# Altium PCB MCU089B.PcbDoc (part 3 of 5)
Units mil, origin at the board's own origin, x right, y up, seen from the top; angles counter-clockwise.
Board outline 2300 x 5500 mil, 4 copper layers (Top Signal, GND, PWR, Bottom Signal), stack 61.6 mil thick; 261 components, 208 nets, 964 pads, 377 vias.
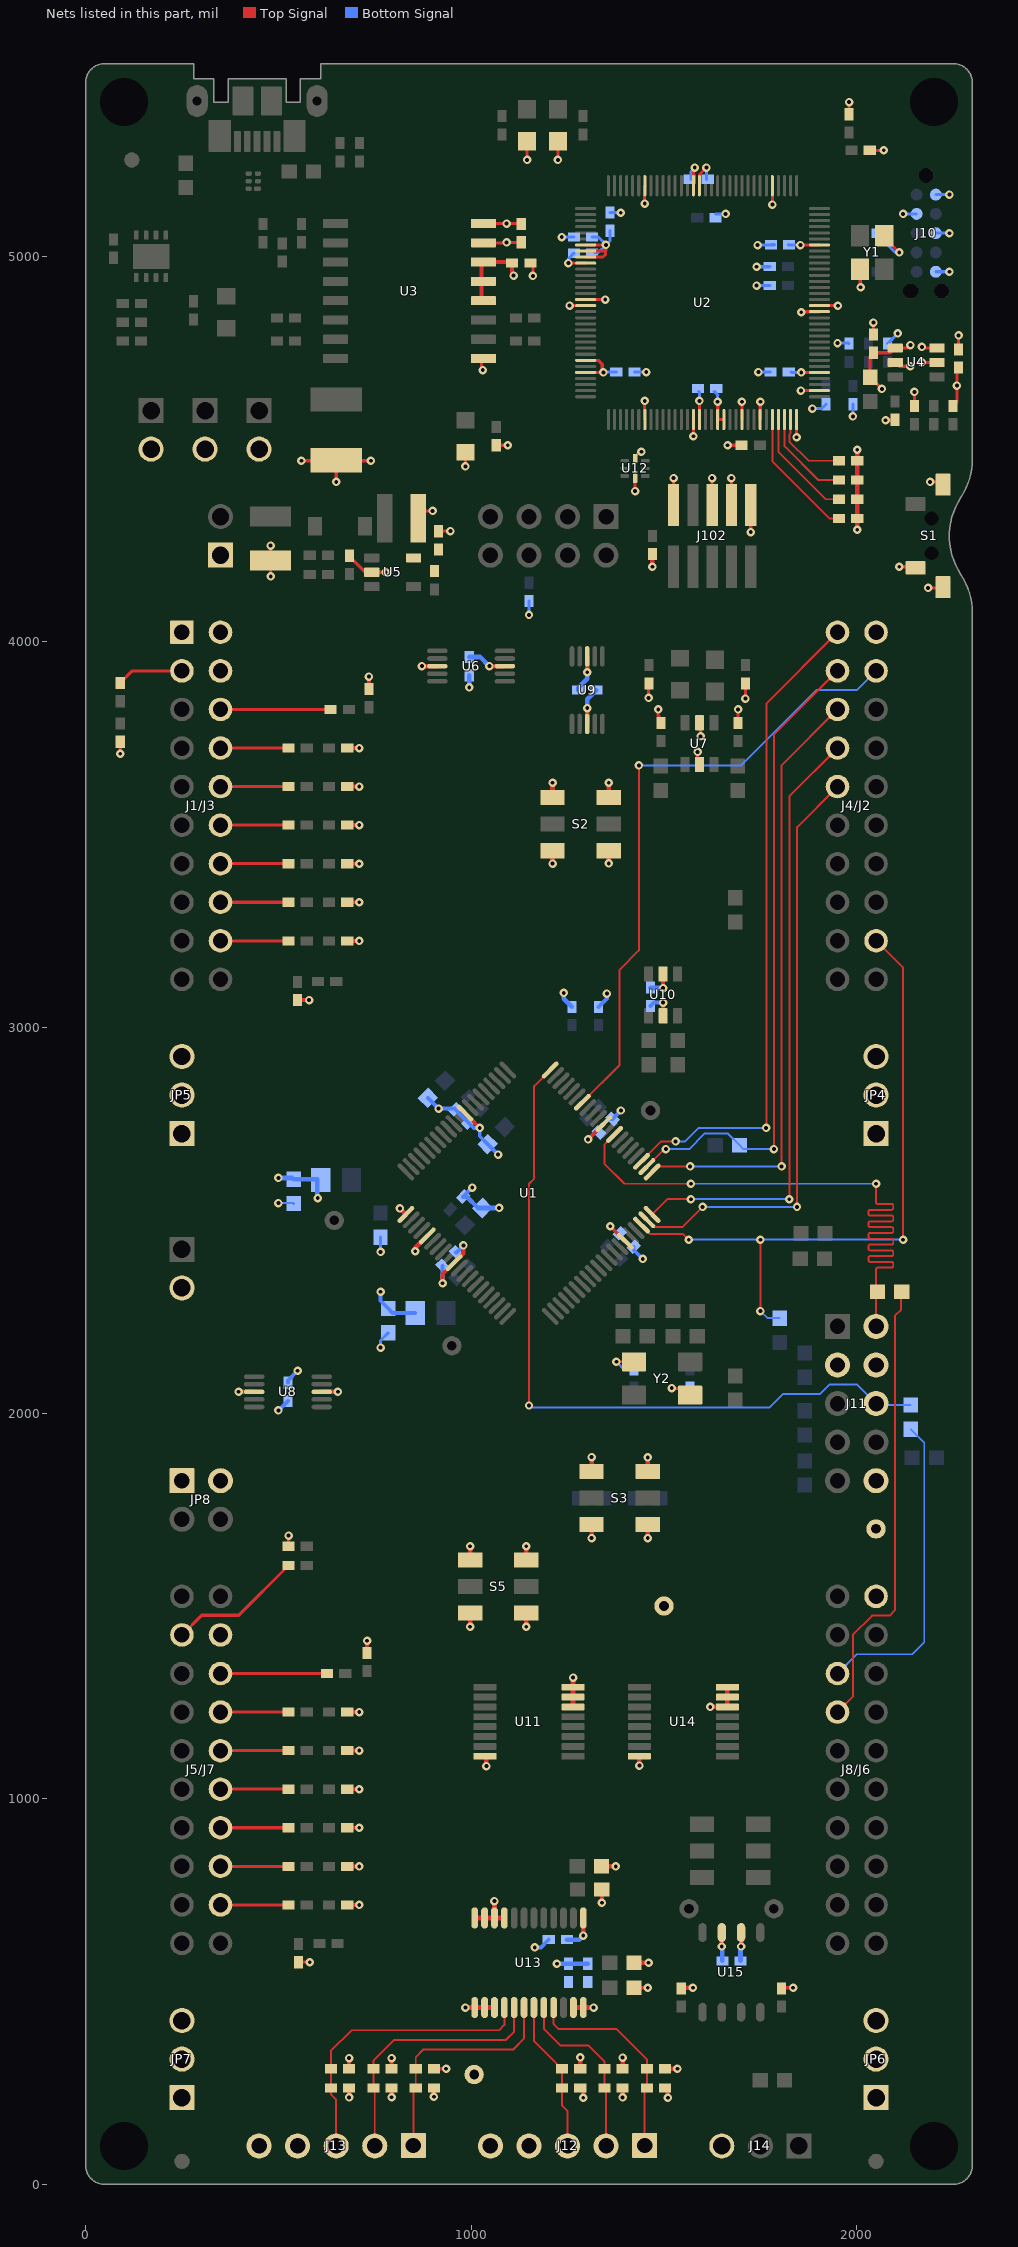
[diagram p4: the nets of this part, all layers, seen from the top]

## Part data (continued)
U1: library part CMP-0089804-2, "32-bit MCU with 100 MHz, FPU, TMU, 128-KB flash, CLB 80-LQFP -40 to 125", Frequency_Fixed=100MHz, Manufacturer="Texas Instruments", Max Supply Voltage=3.63V, Min Supply Voltage=2.8V, Operating Temperature Range="-40癈 to +125癈", AEC Category=Q200, AEC Qualified=No, ComponentLink1Description="Datasheet Link", ComponentLink1URL=http://www.ti.com/lit/ds/symlink/GPN.pdf, ComponentLink2Description="Product Folder", ComponentLink2URL=http://www.ti.com/product/GPN, ComponentLink3Description="Online Datasheet", ComponentLink3URL=http://www.ti.com/product/GPN/datasheet, CompType=IC, Core Architecture=TMS320C28x, Data Bus Width=32bits, Datasheet Path=datasheets/IC-TMS320F280025CPNSR.pdf, helpURL=https://upverter.com/upn/revision/e6f10be0003e77e0/, Interface=I2C,SPI,UART,CAN,LIN,SCI,Other, Memory Size=128KBytes, Memory Type=FLASH, Number Of A/D Converters=2, Number Of Adc Channels=16, Number Of Cores=1, Number Of I2C Channels=2, Number Of I/Os=43, Number Of Pwm Channels=14, Number Of Spi Channels=2, Number Of Timers/Counters=3, Number Of Uart Channels=1, PackageReference=LQFP80, PartId=1, Part Number=TMS320F280025CPNSR, PartNumber=TMS320F280025CPNSR, Ram Size=24KBytes, RoHS=UNKNOWN, SizeZ_mm=1.6mm, Standoff Height=0.05mm, TaMax_C=+125癈, TaMin_C=-40癈, TJmax_C=+125癈
U2: library part CMP-0077953-1, "MSP432E401YTPDT, PDT0128A (TQFP-128)", Alternate Manufacturer="Texas Instruments", Alternate PartNumber=MSP432E401YTPDTR, AEC Category=Q200, AEC Qualified=N, ComponentLink1Description="Datasheet Link", ComponentLink1URL=http://www.ti.com/lit/ds/symlink/tm4c129encpdt.pdf, ComponentLink2Description="Product Folder", ComponentLink2URL=TBD, CompType=IC, Manufacturer="Texas Instruments", MountType=SMT, PackageDescription=TQFP-128, PackageReference=PDT0128A, PartId=1, PartNumber=MSP432E401YTPDT, SizeArea_mm2=256, SizeAreaWB_mm2=324, SizeX_mm=16, SizeY_mm=16, SizeZ_mm=1.2
U3: library part CMP-0091303-1, "Full/Low Speed Isolated USB Repeater, SOIC16-Wide", Manufacturer="Texas Instruments", Max Supply Voltage=5.5V, Min Supply Voltage=3V, Nominal Supply Current=9-9.5mA, Operating Temperature Range="-55癈 to +150癈", AEC Qualified=No, Data Rate=12Mbits/s, Datasheet Path=datasheets/IC-ISOUSB111DW.pdf, helpURL=https://upverter.com/upn/revision/bd93d5af0e7edffb/, Interface=USB, Number of Ports=1, PackageReference=SOICW16, Part Number=ISOUSB111DW, PartNumber=ISOUSB111DW, RoHS=UNKNOWN, SizeZ_mm=2.65mm, Standoff Height=0.1mm, TaMax_C=+125癈, TaMin_C=-40癈, TJmax_C=+150癈, Usb Standard="USB 2.0"
U4: library part CMP-0067340-2, "High-Accuracy, Fixed-Threshold OV/UV Monitor, DDC0006A (SOT-23-T-6)", Alternate Manufacturer="Texas Instruments", Alternate PartNumber=TPS3702CX33DDCT, ComponentLink1Description="Datasheet Link", ComponentLink1URL=http://www.ti.com/lit/ds/symlink/tps3702.pdf, CompType=IC, LatestRevisionDate=2017-06-09, Manufacturer="Texas Instruments", MountType=SMT, PackageDescription=SOT-23-T-6, PackageReference=DDC0006A, PartNumber=TPS3702CX33DDCR, Publisher="Texas Instruments", RoHS=Y, SizeArea_mm2=4.8675, SizeAreaWB_mm2=10.4675, SizeX_mm=1.65, SizeY_mm=2.95, SizeZ_mm=0.87, U/M=EA
U5: library part CMP-0066119-1, "SIMPLE SWITCHER 2.7V to 5.5V, 2.1A Step-Up Regulator in SOT-23, DBV0005A (SOT-23-5)", Alternate Manufacturer="Texas Instruments", Alternate PartNumber=LMR62421XMFE/NOPB, ComponentLink1Description="Datasheet Link", ComponentLink1URL=http://www.ti.com/lit/ds/symlink/lmr62421.pdf, CompType=IC, Footprint Path 6=C:\AltiumLibraries\Footprints\TI\.PcbLib, Green_EU RoHS=Passed, Green_EU RoHS-2=Passed, Green_Lifecycle=Active, Green_REACh=Passed, LatestRevisionDate=2017-06-09, Manufacturer="Texas Instruments", MountType=SMT, PackageDescription=SOT-23-5, PackageReference=DBV0005A, PartNumber=LMR62421XMFX/NOPB, Publisher="Texas Instruments", RoHS=Y, SizeArea_mm2=8.12, SizeAreaWB_mm2=14.82, SizeX_mm=2.8, SizeY_mm=2.9, SizeZ_mm=1.45, U/M=EA
U6 U8 U9: library part CMP-0067418-1, "DUAL 10-Ohm SPDT ANALOG SWITCH, DGS0010A (VSSOP-10)", Alternate Manufacturer="Texas Instruments", Alternate PartNumber=TS5A23157DGST, ComponentLink1Description="Datasheet Link", ComponentLink1URL=http://www.ti.com/lit/ds/symlink/ts5a23157.pdf, CompType=IC, Footprint Path 6=C:\AltiumLibraries\Footprints\TI\.PcbLib, Green_EU RoHS=Passed, Green_EU RoHS-2=Passed, Green_Lifecycle=Active, Green_REACh=Passed, LatestRevisionDate=2017-06-09, Manufacturer="Texas Instruments", MountType=SMT, PackageDescription=VSSOP-10, PackageReference=DGS0010A, PartNumber=TS5A23157DGSR, Publisher="Texas Instruments", RoHS=Y, SizeArea_mm2=14.7, SizeAreaWB_mm2=23.6, SizeX_mm=4.9, SizeY_mm=3.0, SizeZ_mm=1.1, U/M=EA
U7: library part CMP-0051789-2, "Dual Buffer/Driver with Open-Drain Output, DBV0006A, LARGE T&R", F @ Nom Voltage(Max)(Mhz)=150, Generic Part Number=SN74LVC2G07, ICC @ Nom Voltage(Max)(mA)=0.01, Manufacturer="Texas Instruments", Operating Temperature Range(C)="-40 to 125", Rating=Catalog, tpd @ Nom Voltage(Max)(ns)=8.6,4.4,3.7,2.9, Voltage(Nom)(V)=1.8,2.5,3.3,5, 3-State Output=No, AEC Category=Q200, AEC Qualified=N, Bits(#)=2, ComponentLink1Description="Datasheet Link", ComponentLink1URL=http://www.ti.com/lit/ds/symlink/sn74lvc2g07.pdf, ComponentLink2Description="Product Folder", ComponentLink2URL=http://www.ti.com/product/sn74lvc2g07, ComponentLink3Description="Online Datasheet", ComponentLink3URL=http://www.ti.com/product/sn74lvc2g07/datasheet, CompType=IC, DatasheetVersion=SCES308K, Green_EU RoHS=Passed, Green_EU RoHS-2=Passed, Green_Lifecycle=Active, Green_REACh=Passed, Input Type=CMOS/TTL, Logic=True, MountType=SMT, Output Drive (IOL/IOH)(Max)(mA)=32/-32, Output Type=CMOS, PackageDescription=SOT-23-6, PackageReference=DBV0006A, PartNumber=SN74LVC2G07DBVR, RoHS=Y, Schmitt Trigger=No, SizeArea_mm2=8.12, SizeAreaWB_mm2=14.82, SizeX_mm=2.8, SizeY_mm=2.9, SizeZ_mm=1.45, Sub-Family="Inverting Buffer/Driver", Technology Family=LVC, VCC(Max)(V)=5.5, VCC(Min)(V)=1.65
U10: library part CMP-0051910-1, "Dual Buffer Gate, DBV0006A, LARGE T&R", F @ Nom Voltage(Max)(Mhz)=150, Generic Part Number=SN74LVC2G34, ICC @ Nom Voltage(Max)(mA)=0.01, Manufacturer="Texas Instruments", Operating Temperature Range(C)="-40 to 125,-40 to 85", Rating=Catalog, tpd @ Nom Voltage(Max)(ns)=8.6,4.4,4.1,3.2, Voltage(Nom)(V)=1.8,2.5,3.3,5, 3-State Output=No, Bits(#)=2, DatasheetVersion=SCES359I, Input Type=CMOS/TTL, Logic=True, Output Drive (IOL/IOH)(Max)(mA)=32/-32, Output Type=CMOS, PackageReference=DBV0006A, PartNumber=SN74LVC2G34DBVR, Schmitt Trigger=No, Sub-Family="Non-Inverting Buffer/Driver", Technology Family=LVC, VCC(Max)(V)=5.5, VCC(Min)(V)=1.65
U11 U14: library part CMP-0089841-1, "3 Circuit IC Switch 2:1 75Ohm 16-TSSOP", Digikey Part Number=296-3833-1-ND, Manufacturer="Texas Instruments", Max Supply Voltage=5.5V, Min Supply Voltage=2V, Mouser Part Number=595-SN74LV4053APWR, Nominal Supply Current=20uA, On State Resistance=100-225Ω, Operating Temperature Range="-40癈 to +85癈", -3Db Bandwith=50MHz, AEC Qualified=No, ComponentLink1Description=Datasheet, ComponentLink1URL=https://upverter.com/datasheet/3a9d815208c4051a64f1f6fd539a8c5a24990e71.pdf, Datasheet=https://upverter.com/datasheet/3a9d815208c4051a64f1f6fd539a8c5a24990e71.pdf, Datasheet Path=datasheets/IC-SN74LV4053APWR.pdf, Digikey Description="IC MUX/DEMUX TRIPLE 2X1 16TSSOP", helpURL=https://upverter.com/upn/revision/43c5e7c12a31b2aa/, Lead Free=Yes, Mouser Description="Multiplexer Switch ICs Triple 2-Ch Analog", Mux Demux Ratio=2:1, PackageReference=TSSOP16, Part Number=SN74LV4053APWR, PartNumber=SN74LV4053APWR, PositionCount=3, RoHS=TRUE, SizeZ_mm=1.2mm, Standoff Height=0.05mm, TaMax_C=+85癈, TaMin_C=-40癈
U12: library part CMP-0043125-4, "Low-Capacitance 6-Channel +/-15 kV ESD Protection Array for High-Speed Data Interfaces, RSE0008A (UQFN-8)", Breakdown Voltage(Min)(V)=6, IO Capacitance(Typ)(pF)=1.6, IO Leakage Current(nA)=1, Manufacturer="Texas Instruments", 1394 / Firewire=TRUE, AEC Category=Q200, AEC Qualified=N, ComponentLink1Description="Datasheet Link", ComponentLink1URL=http://www.ti.com/lit/ds/symlink/tpd6e004.pdf, ComponentLink2Description="Product Folder", ComponentLink2URL=http://www.ti.com/product/tpd6e004, ComponentLink3Description="Online Datasheet", ComponentLink3URL=http://www.ti.com/product/tpd6e004/datasheet, CompType=IC, DatasheetVersion=SLLS799A, Eco-Plan="Green (RoHS & no Sb/Br)", IEC 61000-4-2 Air-Gap(+/- kV)=12, IEC 61000-4-2 Contact(+/- kV)=8, MountType=SMT, PackageDescription=UQFN-8, PackageReference=RSE0008A, PackageVersion="revD, Jan-2011", PartNumber=TPD6E004RSER, RoHS=Y, Serial ATA / eSATA=TRUE, SizeArea_mm2=2.25, SizeAreaWB_mm2=6.25, SizeX_mm=1.5, SizeY_mm=1.5, SizeZ_mm=0.6, SubFamily="ESD Solution", USB High Speed=TRUE
U13: library part CMP-0066458-2, "8-Bit Dual-Supply Bus Transceiver with Configurable Voltage-Level Shifting and Three-State Outputs, PW0024A (TSSOP-24)", Alternate Manufacturer="Texas Instruments", Operating Temperature Range="-40 to 85 C", Rating=Catalog, AEC Category=Q200, AEC Qualified=N, ComponentLink1Description="Datasheet Link", ComponentLink1URL=http://www.ti.com/lit/ds/symlink/sn74lvc8t245.pdf, ComponentLink2Description="Product Folder", ComponentLink2URL=http://www.ti.com/product/sn74lvc8t245, ComponentLink3Description="Online Datasheet", ComponentLink3URL=http://www.ti.com/product/sn74lvc8t245/datasheet, CompType=IC, Manufacturer="Texas Instruments", MountType=SMT, PackageDescription=TSSOP-24, PackageReference=PW0024A, PartNumber=SN74LVC8T245PW, RoHS=Y, SizeArea_mm2=49.92, SizeAreaWB_mm2=82.32, SizeX_mm=6.4, SizeY_mm=7.8, SizeZ_mm=1.2
U15: library part CMP-0033355-1, "3.3V CAN Transceiver with Sleep Mode, 6 mA, -40 to 125 degC, 8-pin SOIC (D), Green (RoHS & no Sb/Br)", Bus Fault Voltage(V)=+/-30, Drivers Per Package=1, Low Power Mode=Sleep, Manufacturer="Texas Instruments", Rating=Catalog, Supply Voltage(s)(V)=3.3, Code_JEDEC=MS-012AA, ComponentLink1Description=Datasheet, ComponentLink1URL=http://www.ti.com/general/docs/lit/getliterature.tsp?genericPartNumber=SN65HVD234&fileType=pdf, DatasheetVersion=SLLS557F, Eco-Plan="Green (RoHS & no Sb/Br)", ICC(Max)(mA)=6, Isolated=No, Mounting Technology="Surface Mount", PackageDescription="8-Pin Plastic Small Outline Integrated Circuit, 4.9 x 3.9 mm, Pitch 1.27 mm Pitch", PackageReference=D0008A, PackageVersion="revM, Jun-2011", PartNumber=SN65HVD234DR, Receivers Per Package=1, SubFamily=CAN, Transient Pulse Protection(V)="-100 to 100"
U100: library part CMP-0043115-3, "4-Channel ESD Protection Array for High-Speed Data Interfaces, DRY0006A (USON-6)", Breakdown Voltage(Min)(V)=6, IO Capacitance(Typ)(pF)=1.6, IO Leakage Current(nA)=1, Manufacturer="Texas Instruments", Operating Temperature Range="-40 to 85 C", Rating=Catalog, 1394 / Firewire=TRUE, AEC Category=Q200, AEC Qualified=N, ComponentLink1Description="Datasheet Link", ComponentLink1URL=http://www.ti.com/lit/ds/symlink/tpd4e004.pdf, ComponentLink2Description="Product Folder", ComponentLink2URL=http://www.ti.com/product/tpd4e004, ComponentLink3Description="Online Datasheet", ComponentLink3URL=http://www.ti.com/product/tpd4e004/datasheet, CompType=IC, Eco-Plan="Green (RoHS & no Sb/Br)", IEC 61000-4-2 Air-Gap(+/- kV)=12, IEC 61000-4-2 Contact(+/- kV)=8, MountType=SMT, PackageDescription=USON-6, PackageReference=DRY0006A, PartNumber=TPD4E004DRYR, RoHS=Y, Serial ATA / eSATA=TRUE, SizeArea_mm2=1.45, SizeAreaWB_mm2=4.9, SizeX_mm=1.0, SizeY_mm=1.45, SizeZ_mm=0.6, USB High Speed=TRUE
U101: library part CMP-0036402-3, "Single Output High PSRR LDO, 1 A, Adjustable 1.2 to 5.5 V Output, 2.7 to 5.5 V Input, 8-pin SON (DRB), -40 to 125 degC, Green (RoHS & no Sb/Br)", Manufacturer="Texas Instruments", Accuracy(%)=2, AEC Category=Q200, AEC Qualified=N, ComponentLink1Description="Manufacturer URL", ComponentLink1URL=http://www.ti.com/, ComponentLink2Description=Datasheet, ComponentLink2URL=http://www.ti.com/general/docs/lit/getliterature.tsp?genericPartNumber=TPS79601&fileType=pdf, ComponentLink3Description="Package Specification", ComponentLink3URL=http://www.ti.com/litv/pdf/mpds118h, CompType=IC, DatasheetVersion=SLVS351N, Eco-Plan="Green (RoHS & no Sb/Br)", Iout(Max)(A)=1, Iq(Typ)(mA)=0.26, MountType=SMT, PackageDescription=VSON-8, PackageReference=DRB0008B, PackageVersion=4203482-2/K, PartNumber=TPS79601DRBR, RoHS=Y, SizeArea_mm2=9.0, SizeAreaWB_mm2=16.0, SizeX_mm=3.0, SizeY_mm=3.0, SizeZ_mm=1.0, SubFamily="Single Channel LDO", Vdo(Typ)(mV)=250, Vin(Max)(V)=5.5, Vin(Min)(V)=2.7, Vout Adj(Max)(V)=5.5, Vout Adj(Min)(V)=1.2
USB101: library part CMP-0055311-1, "Receptacle, USB 2.0, Micro B, 5 Position, R/A, SMT", Color=Black, Current_A=1.8A, Manufacturer=Molex, Supplier Part Number 1=WM11263CT-ND, Voltage_V=30V, Cert_UL=Y, CNHeader=FALSE, ComponentLink1Description="Datasheet URL", ComponentLink1URL=http://www.molex.com/pdm_docs/sd/1051640001_sd.pdf, CompType=USB, ContactFinish=Gold, CT=TRUE, Gender=Female, LatestRevisionDate=26/05/2017, MountType=SMT, Orientation=R/A, PackageReference="Receptacle, USB 2.0, Micro B, 5 Pos, 0.65mm Pitch, R/A, SMT", PartNumber=1051640001, PinCount=5, Pitch_mm=0.65, Publisher="Texas Instruments", RoHS=Y, Supplier 1=Digi-Key, Supplier 2=Newark, Supplier 3=Mouser, Supplier Part Number 2=99Y3224, Supplier Part Number 3=538-105164-0001
Y1: library part CMP-0004635-3, "Crystal, 16 MHz, 8pF, SMD", Frequency_Fixed=16MHz, Frequency Stability=+/-30ppm, Manufacturer=NDK, Supplier Part Number 1=644-1157-1-ND, ComponentLink1Description="Datasheet Link", ComponentLink1URL=http://www.ndk.com/images/products/catalog/c_NX3225GA-STD-CRG-1_e.pdf, CompType=Crystal, MountType=SMT, PackageReference=3.2x0.75x2.5mm, PartNumber=NX3225GA-16.000M-STD-CRG-1, RoHS=Y, Supplier 1=Digi-Key, TaMax_C=70癈, TaMin_C=-10癈
Y2: library part CMP-0093370-1, "20 MHz ?0ppm Crystal 8pF 40 Ohms 4-SMD, No Lead", Digikey Part Number=XC1841CT-ND, Frequency Stability=10ppm, Frequency_Fixed=20MHz, Load Capacitance=8pF, Manufacturer="ECS International", Mouser Part Number=520-200-8-30B-CKM, Operating Temperature Range="-20癈 to +70癈", AEC Qualified=No, ComponentLink1Description=Datasheet, ComponentLink1URL=https://ecsxtal.com/store/pdf/ecx_53b.pdf, Datasheet=https://ecsxtal.com/store/pdf/ecx_53b.pdf, Datasheet Path=datasheets/Crys-ECS-200-8-30B-CKM.pdf, Digikey Description="CRYSTAL 20.0000MHZ 8PF SMD", Esr=40, Frequency Tolerance=10ppm, helpURL=https://upverter.com/upn/revision/b9ae4a09c701963d/, Lead Free=Yes, Mouser Description="Crystals 20.000MHZ 8pF 10ppm -20C +70C", PackageReference=SMD4, Part Number=ECS-200-8-30B-CKM, PartNumber=ECS-200-8-30B-CKM, RoHS=TRUE, Series=ECX-53B, SizeZ_mm=0.85mm, Supplier 1=Digikey, Supplier 2=Mouser, Supplier Part Number 1=XC1841CT-ND, Supplier Part Number 2=520-200-8-30B-CKM, Tolerance_%=10ppm
ZZ1: library part CMP-0077236-1, ClassName=AssemblyNote, CompType=AssemblyNote, Key=AssemblyNote, LatestRevisionDate=2017-08-10, Publisher="Texas Instruments"
ZZ2: library part CMP-0077237-1, ClassName=AssemblyNote, CompType=AssemblyNote, Key=AssemblyNote, LatestRevisionDate=2017-08-10, Publisher="Texas Instruments"
ZZ3: library part CMP-0077238-1, ClassName=AssemblyNote, CompType=AssemblyNote, Key=AssemblyNote, LatestRevisionDate=2017-08-10, Publisher="Texas Instruments"

## Free pads (board coordinates)
  rrect9% 41.73x57.87 on Top Paste: 9(145.2,5000) 9(194.8,5000)

## Via types
v1: diameter 22, hole 10, Top Signal to Bottom Signal, tented both sides, 377 vias

## Nets (pads, with @x,y where several pads share a name; then routed paths per layer and width w, separated by ;. In a path a pad name is that pad's centre, name@x,y a point inside that pad or via, vN(x,y) a via of type N, cw(c..) or ccw(c..) an arc to the next point about the centre after c; other vN are vias at no path point)
+3V3: C1.2 C2.2 C5.1 C6.2 C16.1 C18.1 C43.1 C44.2 C45.1 C46.2 C49.2 C51.1 C52.1 C53.1 C54.1 C55.1 C56.1 C57.1 C58.1 C64.1 C74.2 J1/J3.1 J10.1 J11.10 J102.1 JP2.2 JP4.1 JP6.1 JP8.1 L1.1 L2.2 L3.1 R3.2 R4.2 R6.2 R8.2 R10.2 R11.2 R28.2 R29.2 R30.2 R31.2 R47.2 R48.2 R57.2 R58.2 R59.2 R60.2 R61.2 R65.2 R70.2 R78.2 S2.1 S2.4 S3.3 S3.6 S5.3 S5.6 TP4.1 U2.7 U2.8 U2.9 U2.16 U2.26 U2.28 U2.39 U2.47 U2.51 U2.52 U2.69 U2.79 U2.90 U2.101 U2.113 U2.122 U3.12 U3.13 U3.14 U3.16 U4.3 U4.4 U4.5 U5.5 U6.8 U7.5 U8.8 U9.8 U10.5 U11.16 U12.8 U13.1 U14.16 U15.3 | length 3763
  Top Signal w8: L1.1@860.44,4318.04 L1.1@862.78,4320.38 882.4,4340 v1(900,4340) ; U3.16@1027.01,5085 C1.2@1135,5085 ; R3.2@1065,4510.04 v1(1095,4510.11) ; U2.28@1296.85,4698.9 1296.95,4699 v1(1343,4699) ; U2.26@1296.85,4730.39 1329.61,4730.39 1340,4720 v1@1340,4700 ; U2.16@1296.85,4887.87 v1(1347.87,4887.87) ; U2.9@1296.85,4998.11 1341.75,4998.11 1347.86,5004.22 1347.86,5013.86 ; U2.8@1296.85,5013.86 1347.86,5013.86 ; U2.7@1296.85,5029.61 1349,5029.61 1349,5015 1347.86,5013.86 ; v1(1425,4391.38) U12.8@1425,4424.41 ; v1(1450,4625) 1450,4577.24 U2.39@1450.39,4576.85 ; v1(1450,5137) 1450,5182.76 U2.122@1450.39,5183.15 ; v1(1460,3855) R28.2@1460,3883.57 ; R28.2@1462.04,3891.53 R28.2@1460,3889.49 ; v1(1485,3825) 1485,3808.57 1492.04,3801.53 R30.2@1492.04,3790.15 R30.2@1491.35,3790.84 ; v1(1576.38,4533.62) U2.47@1576.38,4576.85 ; U7.5@1592.04,3790.66 1595,3787.7 v1(1595,3755) ; U2.113@1592.13,5183.15 1592.13,5212.13 v1(1610,5230) ; v1(1639,4623) 1639,4619.74 1639.37,4619.37 1639.37,4576.85 U2.52@1654.78,4576.85 ; R31.2@1692.04,3790.15 v1(1692.04,3825) ; v1(1711.41,3853.35) 1711.41,3881.49 1717.04,3887.12 R29.2@1711.41,3892.75 ; v1(1725,4285) J102.1@1725,4355.12 ; v1(1781,5134) 1781,5183.05 U2.101@1781.1,5183.15 ; v1(1854,5029) 1901.76,5029 1902.76,5030 U2.90@1903.15,5029.61 ; v1@1855,4855 1856.38,4856.38 U2.79@1903.15,4856.38 ; v1(1856,4699) 1861,4699 1861.1,4698.9 U2.69@1903.15,4698.9 ; v1(2065,4656.22) R6.2@2034.61,4686.61 2034.61,4741.38 C44.2@2043.23,4750 2087.48,4750 U4.4@2099.88,4762.4 2131.42,4762.4 v1(2139.02,4770) ; U4.5@2099.88,4725 2109.88,4715 v1(2139.02,4715) ; R4.2@2149.61,4612 v1(2149.61,4648.38) ; v1(2169.02,4765) 2173.21,4765 2176.21,4762 2176.61,4762.4 U4.3@2208.15,4762.4 ; C6.2@2264.02,4758.62 v1(2264.02,4795) ; R28.2@1460,3883.57 1457.04,3886.53 R28.2@1460,3889.49 ; R28.2@1460,3883.57 R28.2@1460,3889.49
  Top Signal w10: U3.12@1027.01,4885 1027.01,4935 1027.01,4985 1103.74,4985 C2.2@1106.38,4982.36 1106.38,4953.62 v1(1110,4950) ; v1(1497.6,3102.6) U10.5@1497.6,3138.76
  Top Signal w12: U8.8@612.6,2055.5 v1(654.5,2055.5) ; S5.6@997.34,1619.4 v1(997.34,1655) ; U11.16@1035.83,1110.43 1039.43,1106.83 v1(1039.43,1085) ; v1(1047.34,3937.39) U6.8@1087.57,3937.39 ; S5.3@1143.01,1619.4 v1(1143.01,1655) ; S2.1@1210.98,3596.53 v1(1210.98,3635) ; v1(1290.75,645.46) U13.1@1290.75,691.14 ; v1(1300.9,3921.5) U9.8@1300.9,3962.6 ; S3.6@1312.28,1848.9 v1(1312.28,1886.4) ; R47.2@1338.35,825 v1(1375,825) ; S2.4@1356.65,3596.53 v1(1356.65,3635) ; R48.2@1422.24,575 v1(1460,575) ; v1(1436.21,1086.21) U14.16@1436.21,1110.43 ; S3.3@1457.95,1848.9 v1(1457.95,1885.49) ; v1(1470,4195) R57.2@1470,4227.69 ; R78.2@1544.88,508.62 1546.26,510 v1(1575,510) ; v1(1650,617.1) U15.3@1650,653.35 ; v1(2001.1,4291.1) R61.2@2001.1,4320 R60.2@2001.1,4370 R59.2@2001.1,4420 R58.2@2001.1,4470 v1(2001.1,4498.5)
  Bottom Signal w8: v1(1150,4070) R10.2@1150,4106.38 ; C58.1@1313.62,5050 1330,5050 1350,5030 1360,5040 C56.1@1360,5066.38 ; C57.1@1320,5010 1330,5010 v1(1349.61,5029.61) ; v1@1340,4700 C55.1@1376.38,4700 ; C51.1@1610,5200 v1(1610,5230) ; C54.1@1630,4650 1640,4640 1639,4639 v1(1639,4623) ; C52.1@1823,5030 1824,5029 v1(1854,5029) 1859,5029 1860,5030 v1@1854,5030 ; C53.1@1830,4700 1831,4699 v1(1856,4699) ; v1(1885,4605) 1908.62,4605 R70.2@1920,4616.38 ; v1(1950,4775) 1978.62,4775 R65.2@1980,4773.62 ; J10.1@2205,5160 v1(2240,5160)
  Bottom Signal w10: C45.1@525,2079.12 525,2085 v1(550,2110) ; v1(765,2314.88) 765,2291.5 C18.1@785,2271.5 796.5,2260 L3.1@855,2260
  Bottom Signal w12: v1(500,2610) 536.5,2610 C16.1@540,2606.5 600.55,2606.5 600.55,2559.45 v1(602.05,2557.95) ; C43.1@995,3961.01 1023.72,3961.01 v1(1047.34,3937.39) ; v1(1240,3090) 1240,3074.68 R11.2@1261.06,3053.62 ; C64.1@1248.62,635.05 1280.34,635.05 v1(1290.75,645.46) ; C46.2@1277.28,3875 1277.28,3881.53 1300.9,3905.15 v1(1300.9,3921.5) ; C49.2@1465,3103.62 1466.02,3102.6 v1(1497.6,3102.6) ; v1(1650,617.1) 1651.38,615.73 C74.2@1651.38,580
  other v1: 1856,4855 1092,5085
+5V0: C65.2 C67.1 J1/J3.21 J12.4 J13.4 JP3.2 JP5.1 JP7.1 JP8.2 JP9.1 R62.1 R72.2 R73.2 R74.2 R75.2 R76.2 R77.2 TP5.1 U13.23 U13.24 | length 234.3
  Top Signal w8: R62.1@1980,5368.62 v1(1980,5400)
  Top Signal w12: v1(683.62,225.99) R77.2@683.62,250 ; v1(793.62,226.1) R76.2@793.62,250 ; v1(903.62,227.36) R75.2@903.62,250 ; U13.23@1265.16,458.86 U13.24@1290.75,458.86 v1(1317.29,458.86) ; R74.2@1282.87,250 1290.75,242.13 v1(1290.75,225) ; v1(1392.87,225.99) R73.2@1392.87,250 ; R72.2@1502.87,250 1510,242.87 v1(1510,225)
ADCINA0/C15: J5/J7.69 R12.1 | length 176.4
  Top Signal w8: J5/J7.69@350,725 R12.1@526.38,725
ADCINA1: J5/J7.42 R13.1 | length 350.9
  Top Signal w8: J5/J7.42@250,1425 301.1,1476.1 397.48,1476.1 R13.1@526.38,1605
ADCINA2/C9: J1/J3.25 R14.1 | length 176.4
  Top Signal w8: J1/J3.25@350,3625 R14.1@526.38,3625
ADCINA3/C5: J1/J3.24 R15.1 | length 176.4
  Top Signal w8: J1/J3.24@350,3725 R15.1@526.38,3725
ADCINA4/C14: J5/J7.66 R16.1 | length 176.4
  Top Signal w8: J5/J7.66@350,1025 R16.1@526.38,1025
ADCINA5/C2: J5/J7.63 R17.1 | length 276.4
  Top Signal w8: J5/J7.63@350,1325 R17.1@626.38,1325
ADCINA6: J1/J3.23 R18.1 | length 285.7
  Top Signal w8: J1/J3.23@350,3825 R18.1@635.68,3825
ADCINA7/C3: J5/J7.64 R19.1 | length 176.4
  Top Signal w8: J5/J7.64@350,1225 R19.1@526.38,1225
ADCINA8/C11: J5/J7.65 R20.1 | length 176.4
  Top Signal w8: J5/J7.65@350,1125 R20.1@526.38,1125
ADCINA9/C8: J5/J7.67 R21.1 | length 176.4
  Top Signal w8: J5/J7.67@350,925 R21.1@526.38,925
ADCINA10/C10: J5/J7.68 R22.1 | length 176.4
  Top Signal w8: J5/J7.68@350,825 R22.1@526.38,825
ADCINA11/C0: J1/J3.28 R23.1 | length 176.4
  Top Signal w8: J1/J3.28@350,3325 R23.1@526.38,3325
ADCINA12/C1: J1/J3.29 R24.1 | length 176.4
  Top Signal w8: J1/J3.29@350,3225 R24.1@526.38,3225
ADCINA14/C4: J1/J3.27 R25.1 | length 176.4
  Top Signal w8: J1/J3.27@350,3425 R25.1@526.38,3425
ADCINA15/C7: J1/J3.26 R26.1 | length 176.4
  Top Signal w8: J1/J3.26@350,3525 R26.1@526.38,3525
ADCINC6: J1/J3.2 R27.1 | length 173
  Top Signal w8: R27.1@90,3893.62 121.38,3925 J1/J3.2@250,3925
DEBUG_ID4: R58.1 U2.63 | length 207.4
  Top Signal w5: U2.63@1828.35,4576.85 1828.35,4541.51 1825.5,4538.66 1825.5,4519.5 1875,4470 R58.1@1953.86,4470
DEBUG_ID5: R59.1 U2.62 | length 246.9
  Top Signal w5: U2.62@1812.6,4576.85 1812.6,4507.4 1900,4420 R59.1@1953.86,4420
DEBUG_ID6: R60.1 U2.61 | length 291.7
  Top Signal w5: U2.61@1796.85,4576.85 1796.85,4493.15 1920,4370 R60.1@1953.86,4370
DEBUG_ID7: R61.1 U2.60 | length 342.4
  Top Signal w5: U2.60@1781.1,4576.85 1781.1,4468.9 1930,4320 R61.1@1953.86,4320
EQEP1A: C68.1 J12.1 R72.1 U13.21 | length 548.4
  Top Signal w5: U13.21@1213.98,458.86 1213.98,415.59 1225.95,403.61 1376.39,403.61 1455.63,324.37 C68.1@1455.63,300 R72.1@1455.63,250 1450,244.37 J12.1@1450,101
EQEP1B: C69.1 J12.2 R73.1 U13.20 | length 468.6
  Top Signal w5: U13.20@1188.39,458.86 1188.39,403.61 1232,360 1305,360 1345.63,319.37 C69.1@1345.63,300 R73.1@1345.63,250 1350,245.63 J12.2@1350,100
EQEP1I: C70.1 J12.3 R74.1 U13.19 | length 395.3
  Top Signal w5: U13.19@1162.8,458.86 1162.8,372.2 1235,300 C70.1@1235.63,300 R74.1@1235.63,250 1235.63,204.37 1250,190 J12.3@1250,100
EQEP2A: C71.1 J13.1 R75.1 U13.18 | length 613
  Top Signal w5: J13.1@850,101 850,243.62 R75.1@856.38,250 C71.1@856.38,300 856.38,330.17 876.21,350 1108.62,350 1137.2,378.58 U13.18@1137.2,458.86
EQEP2B: C72.1 J13.2 R76.1 U13.17 | length 681.7
  Top Signal w5: J13.2@750,100 750,246.38 R76.1@746.38,250 C72.1@746.38,300 746.38,321.38 800,375 1090.37,375 1111.61,396.25 U13.17@1111.61,458.86
EQEP2I: C73.1 J13.3 R77.1 U13.16 | length 774.7
  Top Signal w5: J13.3@650,100 650,220 636.38,233.62 R77.1@636.38,250 C73.1@636.38,300 636.38,346.38 690,400 1072.27,400 1086.02,413.75 U13.16@1086.02,458.86
GND: C1.1 C2.1 C4.2 C5.2 C6.1 C7.2 C8.2 C9.1 C10.2 C11.2 C12.2 C13.2 C14.1 C15.2 C16.2 C17.1 C18.2 C19.2 C20.1 C21.1 C22.1 C23.1 C24.2 C25.2 C26.2 C27.2 C28.2 C29.2 C30.2 C31.2 C32.2 C33.2 C34.2 C35.2 C36.2 C37.2 C38.2 C39.2 C40.2 C41.2 C42.2 C43.2 C44.1 C45.2 C46.1 C47.2 C48.2 C49.1 C50.2 C51.2 C52.2 C53.2 C54.2 C55.2 C56.2 C57.2 C58.2 C59.2 C60.2 C61.2 C62.2 C63.2 C64.2 C65.1 C66.2 C67.2 C68.2 C69.2 C70.2 C71.2 C72.2 C73.2 C74.1 C104.1 J1/J3.22 J4/J2.20 J5/J7.62 J8/J6.60 J10.3 J10.5 J10.9 J11.3 J11.4 J12.5 J13.5 J14.3 J15.2 J102.3 J102.5 J102.9 JP1.2 JP4.2 JP4.3 JP5.2 JP5.3 JP6.2 JP6.3 JP7.2 JP7.3 LED1.1 LED2.2 LED3.2 R9.1 R52.1 R53.2 R67.1 R68.1 R80.1 S1.1 S1.2 S1.3 S2.3 S2.6 S3.1 S3.4 S5.1 S5.4 TP6.1 U1.9 U1.21 U1.25 U1.30 U1.55 U1.70 U2.10 U2.17 U2.48 U2.55 U2.58 U2.64 U2.66 U2.80 U2.114 U3.9 U3.15 U4.2 U5.2 U6.3 U7.2 U8.3 U9.3 U10.2 U11.6 U11.7 U11.8 U12.4 U13.9 U13.10 U13.11 U13.12 U13.13 U13.14 U13.15 U14.6 U14.7 U14.8 U15.2 Y1.2 Y1.4 Y2.2 Y2.4 | length 5981.5
  Top Signal w6: v1(1376.69,2133.31) Y2.4@1422.17,2133.31 ; v1(1520,2065) 1549.53,2065 Y2.2@1567.83,2046.69
  Top Signal w8: v1(480,4250) C4.2@480,4211.45 480.19,4211.26 v1(480.19,4170) ; C33.2@526.38,1655 v1(526.38,1682.79) ; C47.2@551.91,576.38 v1(581.36,576.38) ; R9.1@685,4223.62 685,4221.28 725.51,4180.77 U5.2@742.33,4180.77 v1(778.47,4180.77) ; C5.2@915,4287.24 938.62,4287.24 939,4287.62 v1(946,4287.62) ; v1(985,4455.11) LED1.1@985,4492.32 ; v1@1027.01,4712.99 U3.9@1027.01,4735 ; U3.15@1027.01,5035 1090,5035 1091.38,5036.38 C1.1@1128.38,5036.38 ; C1.1@1130,5036.38 C1.1@1128.38,5036.38 ; C1.1@1130,5038 C1.1@1128.38,5036.38 ; v1(1145,5250) LED2.2@1145,5298.66 ; C2.1@1153.62,4982.36 1160,4975.98 v1(1160,4949.37) ; v1(1225,5250) LED3.2@1225,5298.66 ; v1(1252.36,4982.36) U2.10@1296.85,4982.36 ; v1(1255.13,4872.13) U2.17@1296.85,4872.13 ; U12.4@1425,4475.59 1425,4480 1438.2,4493.2 v1(1441.59,4493.2) ; J102.9@1525,4355.12 v1(1525,4425) ; U2.114@1576.38,5183.15 1576.38,5226.38 v1(1580,5230) ; v1(1587.04,3715) 1587.04,3686.53 U7.2@1592.04,3681.53 ; v1(1592,4625) 1592,4618 1592.13,4617.87 U2.48@1592.13,4576.85 ; J102.5@1625,4355.12 v1(1625,4425) ; v1(1665,4510.11) R68.1@1701.38,4510.11 ; J102.3@1675,4355.12 v1(1675,4425) ; v1@1700,4625 v1(1702,4623) 1702.36,4622.64 U2.55@1702.36,4576.85 ; U2.58@1749.61,4576.85 1749.61,4624.61 v1@1750,4625 ; v1(1844,4531) 1844,4540.81 1844.09,4540.91 U2.64@1844.09,4576.85 ; v1@1851.65,4651.65 v1@1855,4651.65 ; v1@1855,4650 1856.65,4651.65 U2.66@1903.15,4651.65 ; v1(1855,4652) v1@1861.31,4652 ; U2.80@1903.15,4872.13 1947.87,4872.13 v1@1950,4870 ; v1@1950,4872 v1(1951,4872) ; Y1.4@2008.5,4966.69 2008.5,4931.5 2010,4930 v1(2010,4920) ; C50.2@2033.62,5275 v1(2070,5275) ; C44.1@2043.23,4797.24 v1(2043.23,4828.23) ; Y1.2@2070,5050 v1(2110,5010) ; v1(2074.61,4575) 2097.64,4575 C8.2@2099.02,4576.38 C8.2@2102.64,4580 ; v1(2110,4195) 2150,4195 S1.3@2150,4185 ; v1(2169.02,4725) U4.2@2208.15,4725 ; v1(2185,4140) S1.1@2225,4140 ; v1(2190,4415) 2216.18,4415 S1.2@2223.31,4407.87 ; C7.2@2249.61,4612 2259.61,4622 v1(2259.61,4665) 2259.61,4706.97 C6.1@2264.02,4711.38
  Top Signal w10: v1(90,3710) C40.2@90,3741.38 ; C48.2@549.19,3071.38 v1(579.62,3071.38) ; v1(560,4470) 649.27,4470 C104.1@650,4469.27 ; v1(650,4415) C104.1@650,4469.27 ; C25.2@678.62,725 v1(710,725) ; C30.2@678.62,825 v1(710,825) ; C37.2@678.62,925 v1(710,925) ; C27.2@678.62,1025 v1(710,1025) ; C29.2@678.62,1125 v1(710,1125) ; C36.2@678.62,1225 v1(710,1225) ; C31.2@678.62,3225 v1(710,3225) ; C38.2@678.62,3325 v1(710,3325) ; C39.2@678.62,3425 v1(710,3425) ; C32.2@678.62,3525 v1(710,3525) ; C26.2@678.62,3625 v1(710,3625) ; C34.2@678.62,3725 v1(710,3725) ; C73.2@683.62,300 v1(683.62,327.69) ; C35.2@730,1378.62 v1(730,1410) ; C28.2@735,3877.93 v1(735,3910) ; v1(740,4470) 650.73,4470 C104.1@650,4469.27 ; C72.2@793.62,300 v1(793.62,327.58) ; C71.2@903.62,300 v1(935,300) ; v1(925.96,2337) 925.96,2360.45 U1.30@955.81,2390.29 980,2414.49 v1(980,2435) ; U1.9@983.64,2778.64 v1(1022.29,2740) ; v1(1303.35,2710) U1.70@1344.16,2750.81 ; v1(1338.9,730.54) R52.1@1338.9,765 ; v1(1360.81,2485) U1.55@1399.84,2445.97 ; R53.2@1422.24,510 v1(1457.95,510) ; U10.2@1497.6,3030.49 v1(1497.6,3065) ; R80.1@1805,508.62 1806.38,510 v1(1835,510)
  Top Signal w12: v1(397,2055.5) U8.3@437.4,2055.5 ; v1(815.09,2531) U1.21@830.53,2515.57 ; v1(855,2420) 855,2428.68 U1.25@886.21,2459.89 ; v1(872.34,3937.39) U6.3@912.38,3937.39 ; v1(985,458.86) U13.13@1009.25,458.86 U13.14@1034.84,458.86 U13.15@1060.43,458.86 ; v1(997.34,1446.35) S5.4@997.34,1481.6 ; U13.12@1009.25,691.14 U13.11@1034.84,691.14 U13.10@1060.43,691.14 U13.9@1086.02,691.14 ; U13.10@1060.43,691.28 v1(1060.43,735) ; v1(1143.01,1446.41) S5.1@1143.01,1481.6 ; v1(1210.98,3425.23) S2.3@1210.98,3458.73 ; U11.6@1264.17,1238.39 U11.7@1264.17,1263.98 U11.8@1264.17,1289.57 v1(1264.17,1314.33) ; C70.2@1282.87,300 v1(1282.87,329.71) ; U9.3@1300.9,3787.4 v1(1300.9,3828.5) ; v1(1312.28,1676.34) S3.4@1312.28,1711.1 ; v1(1356.65,3425.9) S2.6@1356.65,3458.73 ; C69.2@1392.87,300 v1(1392.87,328.84) ; v1(1457.95,1676.34) S3.1@1457.95,1711.1 ; C68.2@1502.87,300 v1(1535,300) ; v1(1620,1238.39) U14.6@1664.56,1238.39 U14.7@1664.56,1263.98 U14.8@1664.56,1289.57 ; v1(1700,617.1) U15.2@1700,653.35
  Bottom Signal w6: v1(500,2545) 538.5,2545 C16.2@540,2543.5 ; v1(1376.69,2133.31) 1396.38,2113.62 C41.2@1422.17,2113.62 ; v1(1520,2065) 1566.46,2065 C42.2@1567.83,2066.38
  Bottom Signal w8: v1(765,2170) 765,2188.5 C18.2@785,2208.5 ; v1(765,2418.13) C24.2@765,2456.23 ; v1(1235,5050) C58.2@1266.38,5050 ; v1(1252.36,4982.36) 1252.36,4993.98 C57.2@1266.38,5008 ; C56.2@1360,5113.62 1376.38,5113.62 1377,5113 v1(1388,5113) ; C55.2@1423.62,4700 v1(1454,4700) ; C51.2@1570,5200 1570,5220 v1(1580,5230) ; C54.2@1590,4650 1592,4648 v1(1592,4625) ; C61.2@1633.62,5110 v1(1660,5110) ; v1(1740,4924) C60.2@1774.38,4924 ; v1(1740,4973) 1773.38,4973 C59.2@1774.38,4974 ; v1(1743,5029) 1776.38,5029 C52.2@1777.38,5030 C52.2@1786.38,5030 ; v1(1745,4700) C53.2@1776.38,4700 ; v1(1990,4585) C66.2@1990,4616.38 ; v1(2010,4920) C63.2@2010,4960 ; C62.2@2050,5060 2100,5010 v1(2110,5010) ; R67.1@2080,4773.62 v1(2106.38,4800) ; v1(2120,5110) J10.9@2155,5110 ; J10.5@2205,4960 v1(2240,4960) ; J10.3@2205,5060 v1(2240,5060)
  Bottom Signal w10: v1(500,2007.5) 500.62,2007.5 C45.2@525,2031.88 ; C9.1@887.73,2817.73 v1(915.46,2790) 956.59,2790 C13.2@958.3,2788.3 C20.1@993.3,2753.3 1006.59,2740 v1(1022.29,2740) 1022.29,2718.17 C19.2@1042.73,2697.73 v1(1069.68,2670.77) ; v1(925.96,2337) C21.1@925.96,2381.7 ; C12.2@960.96,2416.7 961.7,2416.7 v1(980,2435) ; C14.1@979.37,2561.7 v1(1002.67,2585) ; v1(1165,614.95) 1181.27,614.95 C64.2@1201.38,635.05 ; v1(1303.35,2710) 1356.65,2763.3 C10.2@1366.7,2763.3 v1(1388.41,2785) ; C17.1@1330.24,3053.62 1351.85,3075.23 v1(1351.85,3088.15) ; v1(1360.81,2485) 1414.1,2431.7 C11.2@1421.7,2431.7 1421.7,2423.3 v1(1445,2400) ; C49.1@1465,3056.38 1473.62,3065 v1(1497.6,3065)
  Bottom Signal w12: C14.1@979.37,2561.7 988.3,2561.7 1017.73,2532.27 C15.2@1028.85,2532.27 v1(1072.27,2532.27) ; v1(995,3882.34) C43.2@995,3913.77 ; v1(1222.24,572.24) C67.2@1252.36,572.24 C65.1@1302.4,572.24 ; v1(1300.9,3828.5) 1300.9,3851.38 C46.1@1324.52,3875 ; C74.1@1698.62,580 1698.62,615.73 v1(1700,617.1)
  other v1: 1750,4623 1030,4705 1092,5036
GPIO0: J4/J2.40 U1.63 | length 1720.8
  Top Signal w5: U1.63@1441.59,2653.37 1493.22,2705 v1(1530,2705) ; v1@1765.35,2740 1765.35,3840.35 J4/J2.40@1950,4025
  Bottom Signal w5: v1(1530,2705) 1555,2705 1590,2740 v1(1765,2740)
GPIO1: J4/J2.39 R56.2 U1.62 | length 1689.8
  Top Signal w5: U1.62@1455.51,2639.45 1501.06,2685 v1(1505,2685) ; v1(1785,2685) 1785,3760 J4/J2.39@1950,3925
  Bottom Signal w5: v1(1505,2685) 1565,2685 1605,2725 1666.05,2725 R56.2@1696.05,2695 1706.05,2685 v1(1785,2685)
GPIO2: J4/J2.38 U1.61 | length 1586.6
  Top Signal w5: U1.61@1469.43,2625.53 1483.9,2640 v1(1567.83,2640) ; v1(1805,2640) 1805,3680 J4/J2.38@1950,3825
  Bottom Signal w5: v1(1567.83,2640) 1775,2640 v1(1805,2640)
GPIO3: J4/J2.37 U1.60 | length 1593.7
  Top Signal w5: U1.60@1469.43,2515.57 1508.86,2555 v1(1570,2555) ; v1(1825,2555) 1825,3600 J4/J2.37@1950,3725
  Bottom Signal w5: v1(1570,2555) v1(1825,2555)
GPIO4: J4/J2.36 U1.59 | length 1552.7
  Top Signal w5: U1.59@1455.51,2501.65 1474.66,2482.5 1547.5,2482.5 v1(1600,2535) ; v1(1845,2535) 1845,3520 J4/J2.36@1950,3625
  Bottom Signal w5: v1(1600,2535) 1840,2535 v1(1845,2535)
GPIO5: J4/J2.19 U1.74 | length 1650.7
  Top Signal w5: U1.74@1288.48,2806.48 1385,2903 1385,3150 1435,3200 v1(1435,3680)
  Bottom Signal w5: v1(1435,3680) 1700,3680 1895,3875 2000,3875 J4/J2.19@2050,3925
GPIO6_BP: J8/J6.78 R49.2 | length 825.3
  Bottom Signal w5: J8/J6.78@1950,1325 2000,1375 2143.5,1375 2175,1406.5 2175,1923.5 R49.2@2140,1958.5
GPIO6_FSITXD0: J11.6 R49.1 U1.80 | length 1934.8
  Top Signal w5: v1(1150,2020) 1150,2595 1163.21,2608.21 1163.21,2848.24 U1.80@1204.96,2890
  Bottom Signal w5: v1(1150,2020) 1150,2015 1774.38,2015 1809.38,2050 1905,2050 1930,2075 2000,2075 J11.6@2050,2025 2053.5,2021.5 R49.1@2140,2021.5
GPIO7_BP: J8/J6.77 R45.2 | length 1191.5
  Top Signal w5: J8/J6.77@1950,1225 1990,1265 1990,1425 2040,1475 2085,1475 2099.02,1489.02 2099.02,2252.52 2115,2268.5 2115,2298.5 R45.2@2131.5,2315
GPIO7_FSITXCLK: J11.2 R45.1 U1.68 | length 1866.8
  Top Signal w5: U1.68@1372,2722.97 1345.63,2696.6 1345.63,2647.02 1397.65,2595 v1(1570,2595) ; J11.2@2050,2225 2050,2355 2050,2373 cw(c2054.5,2373) 2054.5,2377.5 2090.06,2377.5 ccw(c2090.06,2382) 2094.56,2382 2094.56,2388 ccw(c2090.06,2388) 2090.06,2392.5 2050,2392.5 2034.94,2392.5 cw(c2034.94,2397) 2030.44,2397 2030.44,2403 cw(c2034.94,2403) 2034.94,2407.5 2050,2407.5 2090.06,2407.5 ccw(c2090.06,2412) 2094.56,2412 2094.56,2418 ccw(c2090.06,2418) 2090.06,2422.5 2050,2422.5 2034.94,2422.5 cw(c2034.94,2427) 2030.44,2427 2030.44,2433 cw(c2034.94,2433) 2034.94,2437.5 2050,2437.5 2090.06,2437.5 ccw(c2090.06,2442) 2094.56,2442 2094.56,2448 ccw(c2090.06,2448) 2090.06,2452.5 2050,2452.5 2034.94,2452.5 cw(c2034.94,2457) 2030.44,2457 2030.44,2463 cw(c2034.94,2463) 2034.94,2467.5 2050,2467.5 2090.06,2467.5 ccw(c2090.06,2472) 2094.56,2472 2094.56,2478 ccw(c2090.06,2478) 2090.06,2482.5 2050,2482.5 2034.94,2482.5 cw(c2034.94,2487) 2030.44,2487 2030.44,2493 cw(c2034.94,2493) 2034.94,2497.5 2050,2497.5 2090.06,2497.5 ccw(c2090.06,2502) 2094.56,2502 2094.56,2508 ccw(c2090.06,2508) 2090.06,2512.5 2050,2512.5 2034.94,2512.5 cw(c2034.94,2517) 2030.44,2517 2030.44,2523 cw(c2034.94,2523) 2034.94,2527.5 2050,2527.5 2090.06,2527.5 ccw(c2090.06,2532) 2094.56,2532 2094.56,2538 ccw(c2090.06,2538) 2090.06,2542.5 2054.5,2542.5 cw(c2054.5,2547) 2050,2547 2050,2550 v1(2050,2595)
  Bottom Signal w5: v1(1570,2595) v1(2050,2595)
GPIO8: J4/J2.12 R46.2 U1.58 | length 1740.7
  Top Signal w5: U1.58@1441.59,2487.73 1464.64,2464.69 1549.53,2464.69 v1(1564.21,2450) ; v1(1750,2265) v1(1750,2450) ; J4/J2.12@2050,3225 2120,3155 v1(2120,2450)
  Bottom Signal w5: v1(1564.21,2450) v1(1750,2450) v1(2120,2450) ; v1(1750,2265) 1768.5,2246.5 R46.2@1800,2246.5